# Altium PCB 7April_PCB.PcbDoc
Units mm, origin at the board's own origin, x right, y up, seen from the top; angles counter-clockwise.
Board outline 63.5 x 49.53 mm, 2 copper layers (Top Layer, Bottom Layer); 44 components, 43 nets, 178 pads, 14 vias.
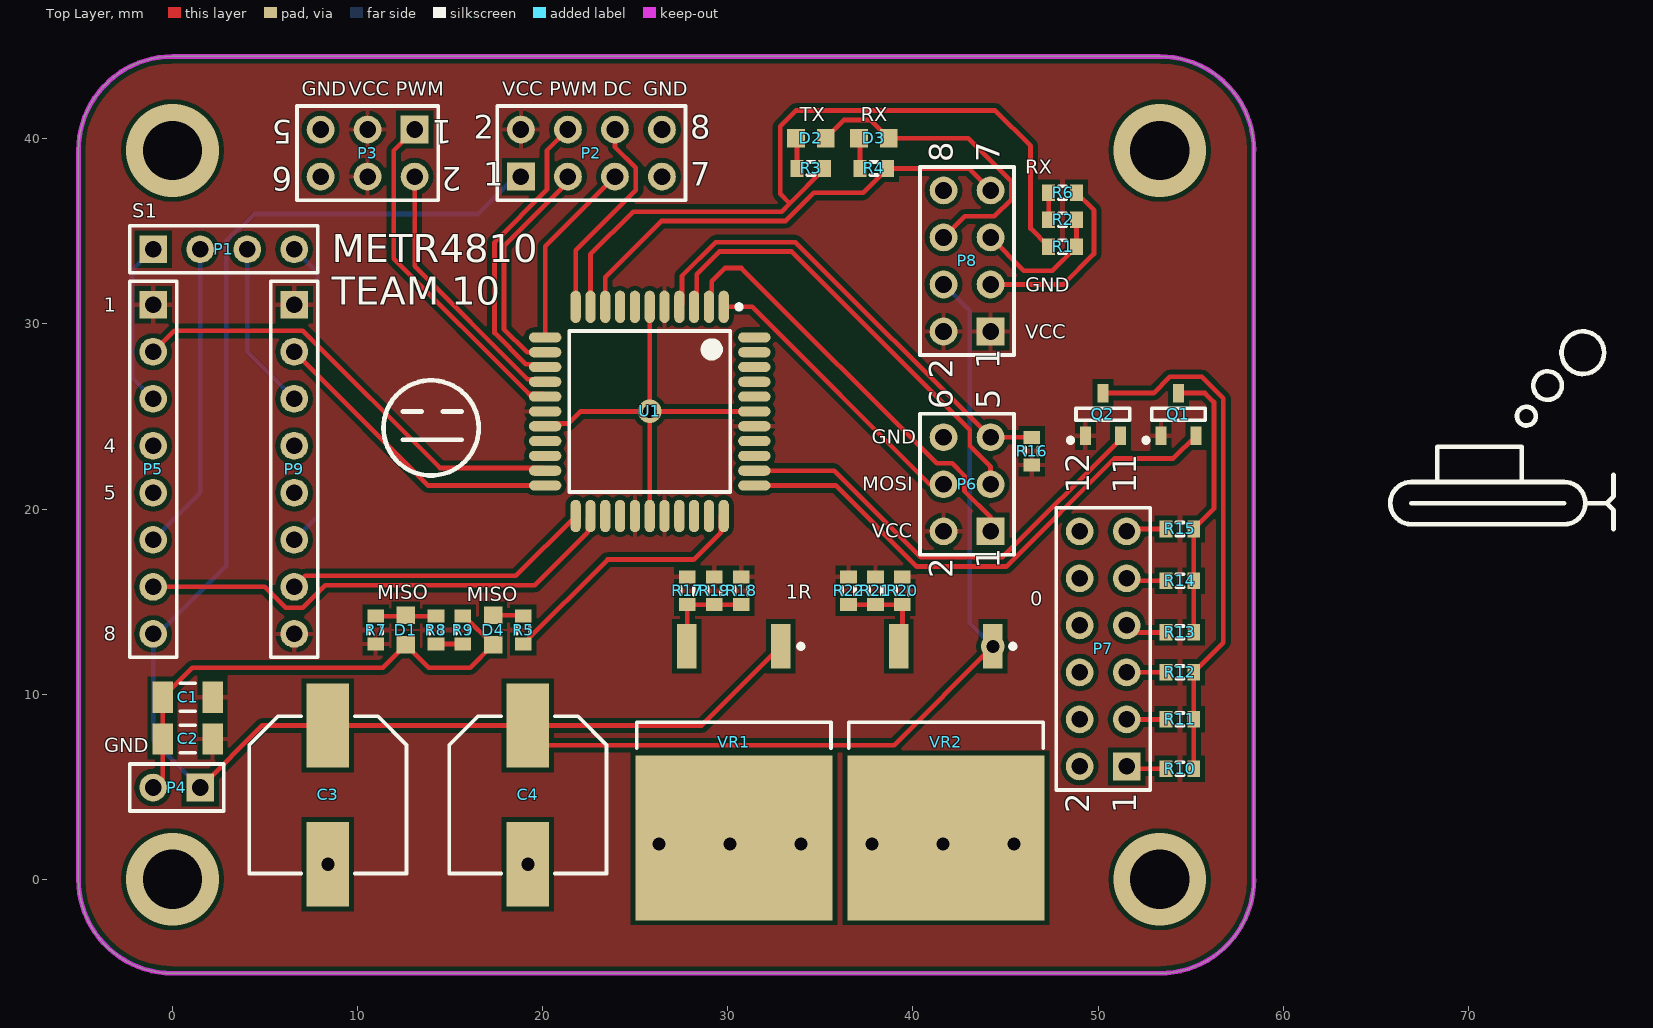
[diagram p0: Top Layer view]
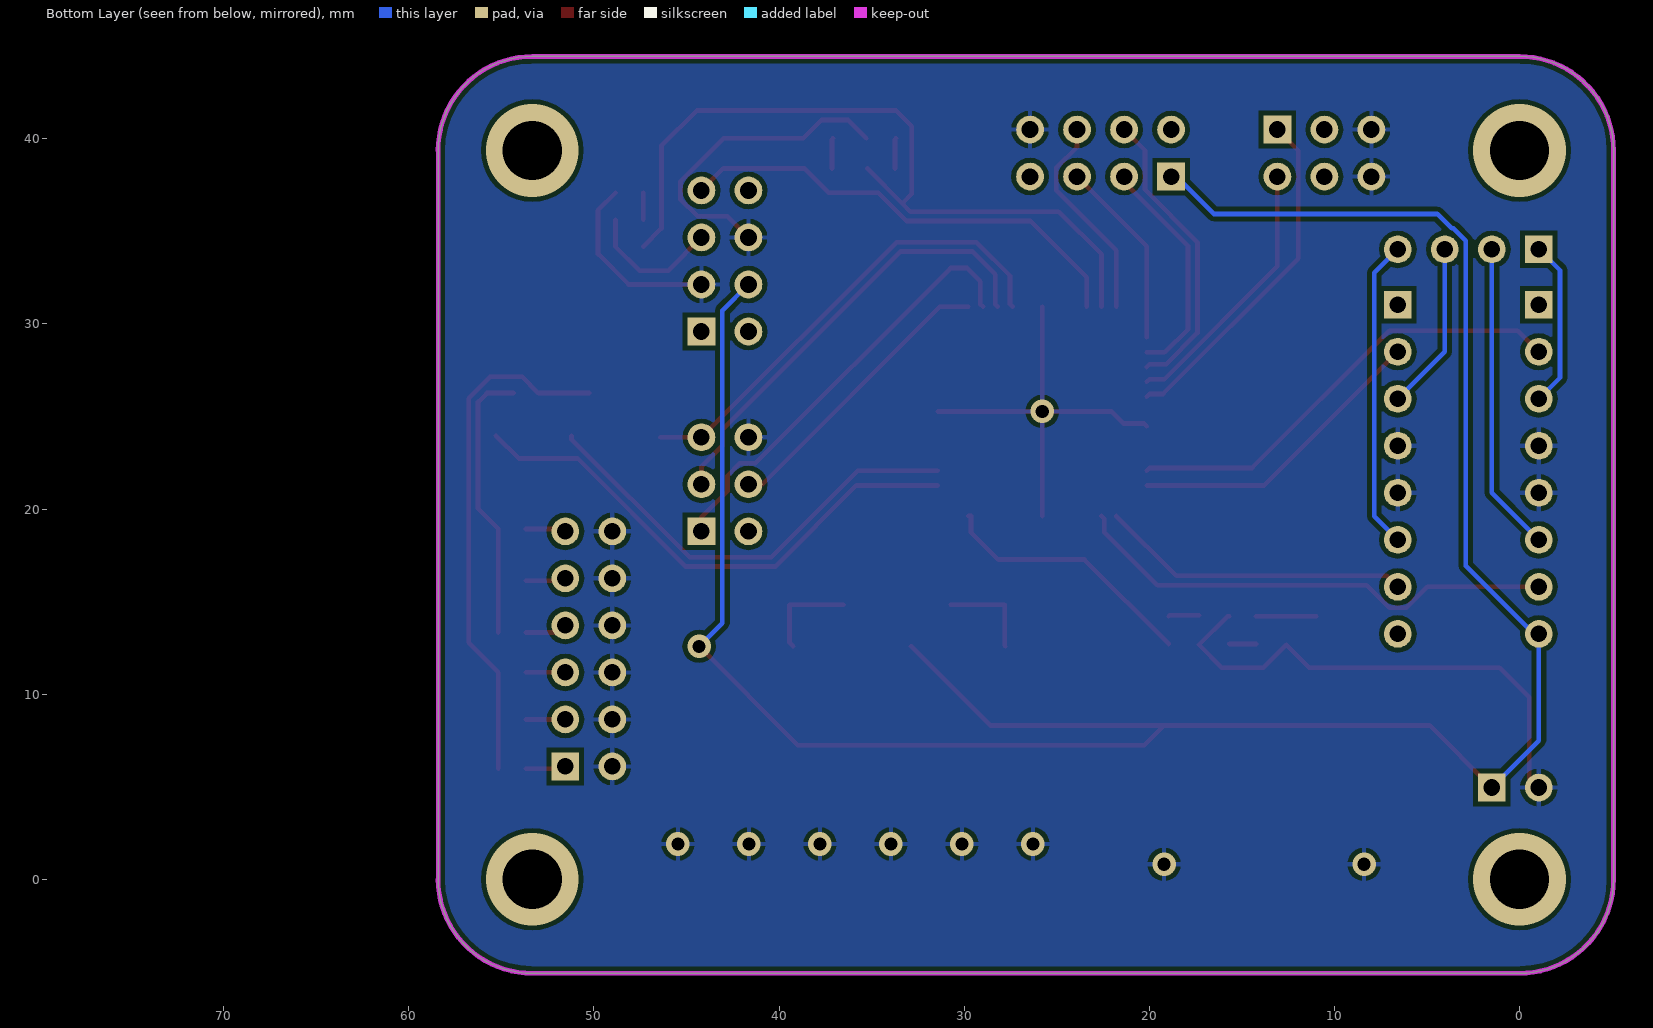
[diagram p1: Bottom Layer view, seen from below]

## Layer stack, top to bottom
Top Solder: solder mask 0.0102, Solder Resist, Dk 3.5
Top Layer: signal copper 0.0356
Dielectric 1: dielectric 0.32, FR-4, Dk 4.8
Bottom Layer: signal copper 0.0356
Bottom Solder: solder mask 0.0102, Solder Resist, Dk 3.5

## Board outline
-5.08,0 -5.08,39.37 -5.082,39.37 cw(c0,39.37) 0,44.452 0,44.45 53.34,44.45 53.34,44.452 cw(c53.34,39.37) 58.422,39.37 58.42,39.37 58.42,0 58.422,0 cw(c53.34,0) 53.34,-5.082 53.34,-5.08 0,-5.08 0,-5.082 cw(c0,0)

## Design rules (kind name [scope] priority, off if disabled: settings)
Clearance [All] p1: gap=0.254
PolygonConnect [All] p1: connectstyle=Relief reliefconductorwidth=0.254 reliefentries=4 polygonreliefangle="90 Angle" airgapwidth=0.254
RoomDefinition METR4810_Schematic [InComponentClass('METR4810_Schematic')] p1: confinementstyle=ConfineIn formatcopy=TRUE lockcomponents=FALSE outline -5.08,-5.08 58.42,-5.08 58.42,44.45 -5.08,44.45
RoutingVias [All] p1: holewidth=0.711 width=1.27 viastyle="Through Hole" minholewidth=0.711 minwidth=1.27 maxholewidth=0.711 maxwidth=1.27
SolderMaskExpansion [All] p1: expansion=0.102
Width [All] p1: maxlimit=0.254 minlimit=0.254 preferedwidth=0.254
30 further rules are at their usual default settings.

## Components (designator, comment, footprint, x,y, rotation, side; value= is the part's Value field where it differs from the comment)
C1 "Cap Semi" C1206 0.816,9.832 r0 top
C2 "Cap Semi" C1206 0.816,7.577 r0 top
C3 "Cap Pol2" CAPAE9983X105M 8.395,4.558 r270 top
C4 "Cap Pol2" CAPAE9983X105M 19.199,4.558 r270 top
D1 "LED1" L0603 12.602,13.463 r270 top
D2 "LED1" L0603 34.485,40.028 r0 top
D3 "LED1" L0603 37.889,40.028 r0 top
D4 "LED1" L0603 17.315,13.463 r270 top
P1 "Header 4" HDR1X4 -1.044,34.032 r0 top
P2 "Header 4X2" HDR2X4 18.822,37.96 r0 top
P3 "Header 3X2" HDR2X3 13.081,40.5 r180 top
P4 "Header 2" HDR1X2 1.496,4.953 r180 top
P5 "Header 8" HDR1X8 -1.044,31.038 r270 top
P6 "Header 3X2" HDR2X3 44.196,18.796 r90 top
P7 "Header 6X2" HDR2X6 51.547,6.096 r90 top
P8 "Header 4X2" HDR2X4 44.196,29.591 r90 top
P9 "Header 8" HDR1X8 6.576,31.038 r270 top
Q1 "MOSFET-P" SOT23-3 54.344,25.115 r90 top
Q2 "MOSFET-P" SOT23-3 50.265,25.115 r90 top
R1 "Res3" J1-0603 48.086,34.175 r0 top
R2 "Res3" J1-0603 48.086,35.63 r180 top
R3 "Res3" J1-0603 34.485,38.399 r0 top
R4 "Res3" J1-0603 37.889,38.399 r0 top
R5 "Res3" J1-0603 18.944,13.463 r270 top
R6 "Res3" J1-0603 48.086,37.084 r0 top
R7 "Res3" J1-0603 10.973,13.463 r90 top
R8 "Res3" J1-0603 14.232,13.463 r270 top
R9 "Res3" J1-0603 15.686,13.463 r90 top
R10 "Res3" J1-0603 54.422,5.969 r0 top
R11 "Res3" J1-0603 54.422,8.636 r0 top
R12 "Res3" J1-0603 54.422,11.176 r0 top
R13 "Res3" J1-0603 54.422,13.335 r0 top
R14 "Res3" J1-0603 54.422,16.129 r0 top
R15 "Res3" J1-0603 54.422,18.923 r0 top
R16 "Res3" J1-0603 46.42,23.126 r270 top
R17 "Res3" J1-0603 27.813,15.588 r90 top
R18 "Res3" J1-0603 30.722,15.588 r90 top
R19 "Res3" J1-0603 29.267,15.588 r90 top
R20 "Res3" J1-0603 39.432,15.588 r90 top
R21 "Res3" J1-0603 37.977,15.588 r90 top
R22 "Res3" J1-0603 36.523,15.588 r90 top
U1 "ATmega324PA-AU" 44A_N 25.781,25.273 r270 top
VR1 "Volt Reg" D2PAK_N 30.329,5.783 r270 top
VR2 "Volt Reg" D2PAK_N 41.783,5.783 r270 top

## Footprints (in the part's own frame and the unit in brackets; to place one, negate y for a bottom-side part, rotate by r counter-clockwise, add the part's x,y. Pads: shape width x height; smd on the part's side, far side on the other; paste and mask are expansions set on the pad)
44A_N [mm] "Thin QFP, 44-Leads, Body 10x10mm, Pitch 0.8mm, IPC Medium Density"
  oval 1.75x0.55 smd: 1(-5.65,4) 2(-5.65,3.2) 3(-5.65,2.4) 4(-5.65,1.6) 5(-5.65,0.8) 6(-5.65,0) 7(-5.65,-0.8) 8(-5.65,-1.6) 9(-5.65,-2.4) 10(-5.65,-3.2) 11(-5.65,-4) 23(5.65,-4) 24(5.65,-3.2) 25(5.65,-2.4) 26(5.65,-1.6) 27(5.65,-0.8) 28(5.65,0) 29(5.65,0.8) 30(5.65,1.6) 31(5.65,2.4) 32(5.65,3.2) 33(5.65,4)
  oval 0.55x1.75 smd: 12(-4,-5.65) 13(-3.2,-5.65) 14(-2.4,-5.65) 15(-1.6,-5.65) 16(-0.8,-5.65) 17(0,-5.65) 18(0.8,-5.65) 19(1.6,-5.65) 20(2.4,-5.65) 21(3.2,-5.65) 22(4,-5.65) 34(4,5.65) 35(3.2,5.65) 36(2.4,5.65) 37(1.6,5.65) 38(0.8,5.65) 39(0,5.65) 40(-0.8,5.65) 41(-1.6,5.65) 42(-2.4,5.65) 43(-3.2,5.65) 44(-4,5.65)
  silkscreen extent -5.77,-4.35 4.35,4.95, body extent -5,-5 5,5, height 1.2
C1206 [mm] "Chip Capacitor, Body 3.2x1.6mm, IPC High Density"
  rect 1.1x1.7 smd: 1(-1.35,0) 2(1.35,0)
  silkscreen extent -0.4,-0.75 0.4,0.75, body extent -1.7,-0.9 1.7,0.9, height 1.3
CAPAE9983X105M [mm] "Aluminum Electrolytic Capacitor, Body 8.30x8.30x10.50mm, IPC Low Density"
  rect 4.55x2.3 smd: 1(-3.75,0) 2(3.75,0)
  silkscreen extent -4.25,-4.25 4.25,4.25, body extent -4.25,-4.25 4.25,4.25, height 10.5
D2PAK_N [mm] "D2-PAK, 4-Leads, Body 8.8x10.4mm, Pitch 2.54mm, Lead Span 15.1mm, IPC Medium Density"
  rect 2.4x1.05 smd: 1(-6.8,2.54) 3(-6.8,-2.54)
  rect 8.9x10.65 smd: 2(3.55,0)
  silkscreen extent -6.92,-5.25 -1.3,5.25, body extent -2.7,-5.28 6.3,5.28, height 4.69
HDR1X2 [mm] "Connector; Header; 2 Position"
  rect 1.5x1.5 hole 0.9: 1(0,0)
  round 1.5 hole 0.9: 2(2.54,0)
  silkscreen extent -1.27,-1.27 3.81,1.27
HDR1X4 [mm] "Connector; Header; 4 Position"
  rect 1.5x1.5 hole 0.9: 1(0,0)
  round 1.5 hole 0.9: 2(2.54,0) 3(5.08,0) 4(7.62,0)
  silkscreen extent -1.27,-1.27 8.89,1.27
HDR1X8 [mm] "Connector; Header; 8 Position"
  rect 1.5x1.5 hole 0.9: 1(0,0)
  round 1.5 hole 0.9: 2(2.54,0) 3(5.08,0) 4(7.62,0) 5(10.16,0) 6(12.7,0) 7(15.24,0) 8(17.78,0)
  silkscreen extent -1.27,-1.27 19.05,1.27
HDR2X3 [mm] "Connector; Header; 3x2 Position"
  rect 1.5x1.5 hole 0.9: 1(0,0)
  round 1.5 hole 0.9: 2(0,2.54) 3(2.54,0) 4(2.54,2.54) 5(5.08,0) 6(5.08,2.54)
  silkscreen extent -1.27,-1.27 6.35,3.81
HDR2X4 [mm] "Connector; Header; 4x2 Position"
  rect 1.5x1.5 hole 0.9: 1(0,0)
  round 1.5 hole 0.9: 2(0,2.54) 3(2.54,0) 4(2.54,2.54) 5(5.08,0) 6(5.08,2.54) 7(7.62,0) 8(7.62,2.54)
  silkscreen extent -1.27,-1.27 8.89,3.81
HDR2X6 [mm] "Connector; Header; 6x2 Position"
  rect 1.5x1.5 hole 0.9: 1(0,0)
  round 1.5 hole 0.9: 2(0,2.54) 3(2.54,0) 4(2.54,2.54) 5(5.08,0) 6(5.08,2.54) 7(7.62,0) 8(7.62,2.54) 9(10.16,0) 10(10.16,2.54) 11(12.7,0) 12(12.7,2.54)
  silkscreen extent -1.27,-1.27 13.97,3.81
J1-0603 [mm] "Chip Resistor, Body 1.6x0.8mm, IPC High Density"
  rect 0.7x0.9 smd: 1(-0.75,0) 2(0.75,0)
  silkscreen extent -0.2,-0.35 0.2,0.35, body extent -0.85,-0.48 0.85,0.48, height 0.9
L0603 [mm]
  rect 0.95x1 smd: 1(-0.8,0) 2(0.8,0)
SOT23-3 [mm]
  rect 1x0.6 smd: 1(-1.15,0.95) 2(-1.15,-0.95) 3(1.15,0)
  silkscreen extent -1.52,-1.45 0.33,1.87

## Part data
C1 C2: "Capacitor (Semiconductor SIM Model)"
C3 C4: "Polarized Capacitor (Axial)"
D1 D2 D3 D4: "Typical RED GaAs LED"
P1: "Header, 4-Pin"
P2 P8: "Header, 4-Pin, Dual row"
P3 P6: "Header, 3-Pin, Dual row"
P4: "Header, 2-Pin"
P5 P9: "Header, 8-Pin"
P7: "Header, 6-Pin, Dual row"
Q1 Q2: "P-Channel MOSFET"
R1 R2 R3 R4 R5 R6 R7 R8 R9 R10 R11 R12 R13 R14 R15 R16 R17 R18 R19 R20 R21 R22: "Resistor"
U1: "8-bit AVR Microcontroller, 32KB Flash, 1KB EEPROM, 2KB SRAM, 44-pin TQFP, Industrial Grade (-40°C to 85°C)"
VR1 VR2: "Voltage Regulator"

## Via types
v1: diameter 1.27, hole 0.711, Top Layer to Bottom Layer, 10 vias
v2: diameter 5, hole 3.2, Top Layer to Bottom Layer, 4 vias

## Nets (pads, with @x,y where several pads share a name; then routed paths per layer and width w, separated by ;. In a path a pad name is that pad's centre, name@x,y a point inside that pad or via, vN(x,y) a via of type N, cw(c..) or ccw(c..) an arc to the next point about the centre after c; other vN are vias at no path point)
BAT: C3.1 C4.1 P2.1 P4.1 P5.8 P8.4 VR1.1 VR2.1 | length 132.7
  Top Layer w0.254: P4.1 4.851,8.308 C3.1 C4.1 ; VR1.1 28.594,8.308 C4.1 ; v1(44.323,12.583) 38.979,7.239 20.269,7.239 C4.1
  Bottom Layer w0.254: P4.1 -1.044,7.493 P5.8 -0.766,13.258 2.905,16.929 2.905,34.5 3.568,35.163 3.667,35.163 4.445,35.941 16.51,35.941 18.529,37.96 P2.1 ; P8.4 43.065,30.722 43.065,13.841 v1(44.323,12.583)
"DC 1 ENABLE": P2.5 U1.12 | length 10.2
  Top Layer w0.254: U1.12 20.131,34.189 P2.5
"DC 2 ENABLE": P2.6 U1.11 | length 11.4
  Top Layer w0.254: U1.11 21.781,33.973 25.033,37.225 25.033,38.428 23.902,39.559 P2.6
GND: C1.1 C2.1 C3.2 C4.2 D1.2 D2.2 D3.2 D4.2 P2.8 P3.5 P3.6 P4.2 P5.4 P5.5 P6.6 P7.2 P7.4 P7.6 P7.8 P7.10 P7.12 P8.3 P8.6 P9.4 P9.5 R6.2 R9.2 U1.6 U1.18 U1.28 U1.39 VR1.2 VR2.2 | length 77.6
  Top Layer w0.254: P4.2 -0.534,5.463 C2.1 C1.1 1.064,11.43 11.37,11.43 D1.2 13.835,11.43 16.083,11.43 D4.2 15.765,14.213 R9.2 ; U1.18 20.275,24.617 21.387,24.617 22.043,25.273 v1(25.781,25.273) ; U1.28 v1(25.781,25.273) ; U1.6 v1(25.781,25.273) ; U1.39 v1(25.781,25.273) ; D2.2 36.278,41.021 37.696,41.021 D3.2 42.978,40.028 45.327,37.679 45.327,36.743 44.398,35.814 42.799,35.814 P8.6 ; P8.3 48.131,32.131 49.782,33.782 49.784,33.782 49.784,36.136 R6.2
  other v1: 8.395,0.808 19.199,0.808 26.289,1.905 30.124,1.905 33.96,1.905 37.795,1.905 41.631,1.905 45.466,1.905
HI-BEAM: Q1.2 U1.34 | length 28.6
  Top Layer w0.254: U1.34 35.835,21.273 40.217,16.891 45.048,16.891 50.89,22.733 54.062,22.733 Q1.2
LO-BEAM: Q2.2 U1.35 | length 24.6
  Top Layer w0.254: U1.35 35.753,22.073 40.427,17.399 44.838,17.399 51.215,23.776 Q2.2
MISO: P6.1 U1.2 | length 23.6
  Top Layer w0.254: U1.2 29.125,31.067 29.125,32.3 29.845,33.02 30.734,33.02 41.287,22.467 42.124,22.467 42.787,21.804 42.787,20.967 44.196,19.558 P6.1
MOSI: P6.4 U1.1 | length 15.8
  Top Layer w0.254: U1.1 31.309,30.923 40.896,21.336 P6.4
NetD2_1: D2.1 R3.1 | length 1.6
  Top Layer w0.254: D2.1 33.735,39.978 R3.1
NetD3_1: D3.1 R4.1 | length 1.6
  Top Layer w0.254: D3.1 37.139,39.978 R4.1
NetD4_1: D4.1 R5.1 | length 1.6
  Top Layer w0.254: D4.1 18.894,14.263 R5.1
NetQ1_3: Q1.3 R13.2 R14.2 R15.2 | length 15
  Top Layer w0.254: Q1.3 55.777,26.265 56.261,25.781 56.261,20.012 R15.2 R14.2 R13.2
NetQ2_3: Q2.3 R10.2 R11.2 R12.2 | length 28
  Top Layer w0.254: Q2.3 53.005,26.265 53.886,27.146 55.615,27.146 56.769,25.991 56.769,12.773 R12.2 R11.2 R10.2
NetR2_2: R2.2 R6.1 | length 1.5
  Top Layer w0.254: R2.2 R6.1
NetR8_2: R8.2 R9.1 | length 1.5
  Top Layer w0.254: R8.2 R9.1
NetR17_1: R17.1 R18.1 R19.1 VR1.3 | length 5.2
  Top Layer w0.254: VR1.3 27.813,12.608 R17.1 R19.1 R18.1
NetR20_1: R20.1 R21.1 R22.1 VR2.3 | length 5.2
  Top Layer w0.254: R22.1 R21.1 R20.1 39.432,12.772 VR2.3
POWER: D1.1 R7.2 R8.1 | length 3.3
  Top Layer w0.254: R7.2 12.552,14.213 R8.1
"PWM DC 1": P2.3 U1.13 | length 12.4
  Top Layer w0.254: U1.13 19.159,28.473 17.907,29.725 17.907,34.207 21.362,37.661 P2.3
"PWM DC 2": P2.4 U1.14 | length 16.1
  Top Layer w0.254: U1.14 19.987,27.817 19.096,27.817 17.399,29.514 17.399,34.417 20.231,37.249 20.231,39.369 P2.4
"PWM SV 1": P3.2 U1.15 | length 14.5
  Top Layer w0.254: P3.2 13.081,33.114 19.178,27.017 19.987,27.017 U1.15
"PWM SV 2": P3.1 U1.16 | length 18.7
  Top Layer w0.254: P3.1 11.95,39.369 11.95,33.526 19.259,26.217 19.987,26.217 U1.16
RESET: P6.5 R16.1 U1.4 | length 25.8
  Top Layer w0.254: U1.4 27.525,31.067 27.525,32.605 29.337,34.417 33.655,34.417 P6.5 R16.1
RXD: P8.7 R4.2 U1.9 | length 25.3
  Top Layer w0.254: U1.9 23.381,32.525 26.416,35.56 33.115,35.56 34.639,37.084 37.324,37.084 R4.2 43.008,38.399 P8.7
S-IN1: P5.2 U1.21 | length 24.8
  Top Layer w0.254: P5.2 0.087,29.629 7.044,29.629 14.456,22.217 19.987,22.217 U1.21
S-IN2: P5.7 U1.24 | length 26.6
  Top Layer w0.254: P5.7 4.977,15.798 6.108,14.667 7.044,14.667 8.262,15.884 19.57,15.884 22.437,18.751 22.437,19.479 U1.24
S-IN3: P9.2 U1.22 | length 16.5
  Top Layer w0.254: P9.2 13.801,21.273 U1.22
S-IN4: P9.7 U1.23 | length 16.8
  Top Layer w0.254: P9.7 7.171,16.392 18.55,16.392 U1.23
S-OUT1: P1.1 P5.3 | length 9
  Bottom Layer w0.254: P5.3 -2.187,27.101 -2.187,32.889 P1.1
S-OUT2: P1.2 P5.6 | length 16.7
  Bottom Layer w0.254: P5.6 1.496,20.878 P1.2
S-OUT3: P1.3 P9.3 | length 9.1
  Bottom Layer w0.254: P1.3 4.036,28.498 P9.3
S-OUT4: P1.4 P9.6 | length 16.7
  Bottom Layer w0.254: P9.6 7.846,19.608 7.846,32.762 P1.4
SCK: P6.3 U1.3 | length 24.5
  Top Layer w0.254: U1.3 28.325,31.067 28.325,32.687 29.547,33.909 33.445,33.909 43.065,24.289 43.065,23.408 44.196,22.277 P6.3
STATUS: R5.2 U1.33 | length 14.2
  Top Layer w0.254: R5.2 23.504,17.272 28.158,17.272 29.637,18.751 29.637,19.623 U1.33
TORCH1: P7.1 R10.1 | length 2.2
  Top Layer w0.254: P7.1 51.674,5.969 R10.1
TORCH2: P7.3 R11.1 | length 2.1
  Top Layer w0.254: P7.3 R11.1
TORCH3: P7.5 R12.1 | length 2.1
  Top Layer w0.254: P7.5 R12.1
TORCH4: P7.7 R13.1 | length 2.3
  Top Layer w0.254: P7.7 51.928,13.335 R13.1
TORCH5: P7.9 R14.1 | length 2.2
  Top Layer w0.254: P7.9 51.674,16.129 R14.1
TORCH6: P7.11 R15.1 | length 2.2
  Top Layer w0.254: P7.11 51.674,18.923 R15.1
TXD: R1.1 R3.2 U1.10 | length 42.3
  Top Layer w0.254: U1.10 22.581,33.757 24.892,36.068 32.904,36.068 33.343,36.507 ; R3.2 33.343,36.507 ; R1.1 46.355,35.157 46.355,39.624 44.45,41.529 33.672,41.529 32.829,40.686 32.829,37.021 33.343,36.507
TXD_3.3V: P8.5 R1.2 R2.1 | length 7.4
  Top Layer w0.254: P8.5 45.991,32.876 47.537,32.876 R1.2 R2.1
VCC: C1.2 C2.2 P2.2 P3.3 P3.4 P5.1 P6.2 P8.1 P8.2 P9.1 P9.8 Q1.1 Q2.1 R7.1 R16.2 R17.2 R18.2 R19.2 R20.2 R21.2 R22.2 U1.5 U1.17 U1.27 U1.29 U1.38
pads on no net: P2.7 P8.8 U1.7 U1.8 U1.19 U1.20 U1.25 U1.26 U1.30 U1.31 U1.32 U1.36 U1.37 U1.40 U1.41 U1.42 U1.43 U1.44
copper on no net:
  other v2: 0,0 53.34,0 0,39.37 53.34,39.37

## Polygon pours and split planes (outlines as drawn)
GND on Bottom Layer "GND_L02_P002" (solid, remove dead copper, pour order 2): -5.08,0 -5.08,39.37 -5.082,39.37 cw(c0,39.37) 0,44.452 0,44.45 53.34,44.45 53.34,44.452 cw(c53.34,39.37) 58.422,39.37 58.42,39.37 58.42,0 58.422,0 cw(c53.34,0) 53.34,-5.082 53.34,-5.08 0,-5.08 0,-5.082 cw(c0.001,-0.001)
VCC on Top Layer "VCC_L01_P003" (solid, remove dead copper, pour order 3): -5.08,0 -5.08,39.37 -5.082,39.37 cw(c0,39.37) 0,44.452 0,44.45 53.34,44.45 53.34,44.452 cw(c53.34,39.37) 58.422,39.37 58.42,39.37 58.42,0 58.422,0 cw(c53.34,0) 53.34,-5.082 53.34,-5.08 0,-5.08 0,-5.082 cw(c0.001,-0.001)

## Keep-outs
Keep-Out Layer:
  lines w0.254: -5.082,0 ccw(c0,0) 0,-5.082 ; -5.082,39.37 cw(c0,39.37) 0,44.452 ; -5.08,0 -5.08,39.37 ; 0,-5.08 53.34,-5.08 ; 0,44.45 53.34,44.45 ; 53.34,-5.082 ccw(c53.34,0) 58.422,0 ; 53.34,44.452 cw(c53.34,39.37) 58.422,39.37 ; 58.42,0 58.42,39.37

## Silkscreen, mask and mechanical layers (free items; w line width, h text height)
Top Overlay:
  circle w0.254: c13.97,24.384 r2.572
  circle w0.254: c76.189,28.448 r1.15
  circle w0.254: c74.284,26.67 r0.773
  circle w0.254: c73.141,25.019 r0.508
  lines w0.254: 12.446,23.749 15.621,23.749 ; 12.446,25.273 13.462,25.273 ; 14.605,25.273 15.621,25.273 ; 66.929,20.32 75.184,20.32 ; 68.326,21.463 68.326,23.368 72.898,23.368 72.898,21.463 ; 76.327,20.32 77.47,20.32 ; 77.851,18.923 77.851,19.939 77.47,20.32 ; 77.851,21.844 77.851,20.701 77.47,20.32 ; 66.929,19.177 cw(c66.929,20.32) 66.929,21.463 75.184,21.463 cw(c75.184,20.32) 75.184,19.177 66.929,19.177
  text "GND" at 6.985,42.316 h0.76
  text "VCC" at 9.525,42.316 h0.76
  text "PWM" at 12.065,42.316 h0.76
  text "VCC" at 17.806,42.316 h0.76
  text "PWM" at 20.346,42.316 h0.76
  text "DC" at 23.267,42.316 h0.76
  text "GND" at 25.426,42.316 h0.76
  text "TX" at 33.881,40.944 h0.76
  text "RX" at 37.183,40.944 h0.76
  text "RX" at 46.073,38.125 h0.76
  text "S1" at -2.187,35.737 h0.76
  text "GND" at 46.073,31.75 h0.76
  text "METR4810 / TEAM 10" at 8.608,31.038 h1.52
  text "1" at -3.711,30.657 h0.76
  text "VCC" at 46.073,29.21 h0.76
  text "GND" at 37.77,23.52 h0.76
  text "4" at -3.711,23.037 h0.76
  text "MOSI" at 37.262,20.98 h0.76
  text "5" at -3.711,20.497 h0.76
  text "VCC" at 37.77,18.44 h0.76
  text "1R" at 33.119,15.163 h0.76
  text "MISO" at 11.062,15.138 h0.76
  text "MISO" at 15.888,15.011 h0.76
  text "0" at 46.327,14.782 h0.76
  text "8" at -3.711,12.877 h0.76
  text "GND" at -3.683,6.858 h0.76

## Text inside footprints (layer, text, board x,y; h text height)
P2: Top Overlay "8" at 27.966,39.992 h1.27; Top Overlay "7" at 27.966,37.452 h1.27; Top Overlay "1" at 16.79,37.452 h1.27; Top Overlay "2" at 16.282,39.992 h1.27
P3: Top Overlay "1" at 15.113,41.008 h1.27 r180; Top Overlay "2" at 15.621,38.468 h1.27 r180; Top Overlay "5" at 6.477,41.008 h1.27 r180; Top Overlay "6" at 6.477,38.468 h1.27 r180
P6: Top Overlay "1" at 44.704,16.764 h1.27 r90; Top Overlay "2" at 42.164,16.256 h1.27 r90; Top Overlay "5" at 44.704,25.4 h1.27 r90; Top Overlay "6" at 42.164,25.4 h1.27 r90
P7: Top Overlay "2" at 49.515,3.556 h1.27 r90; Top Overlay "1" at 52.055,3.556 h1.27 r90; Top Overlay "1" at 52.055,20.828 h1.27 r90; Top Overlay "1" at 52.055,21.844 h1.27 r90; Top Overlay "12" at 49.515,20.828 h1.27 r90
P8: Top Overlay "8" at 42.164,38.735 h1.27 r90; Top Overlay "7" at 44.704,38.735 h1.27 r90; Top Overlay "1" at 44.704,27.559 h1.27 r90; Top Overlay "2" at 42.164,27.051 h1.27 r90